# EAGLE board Granny Safe1 (EAGLE 8.4.0)
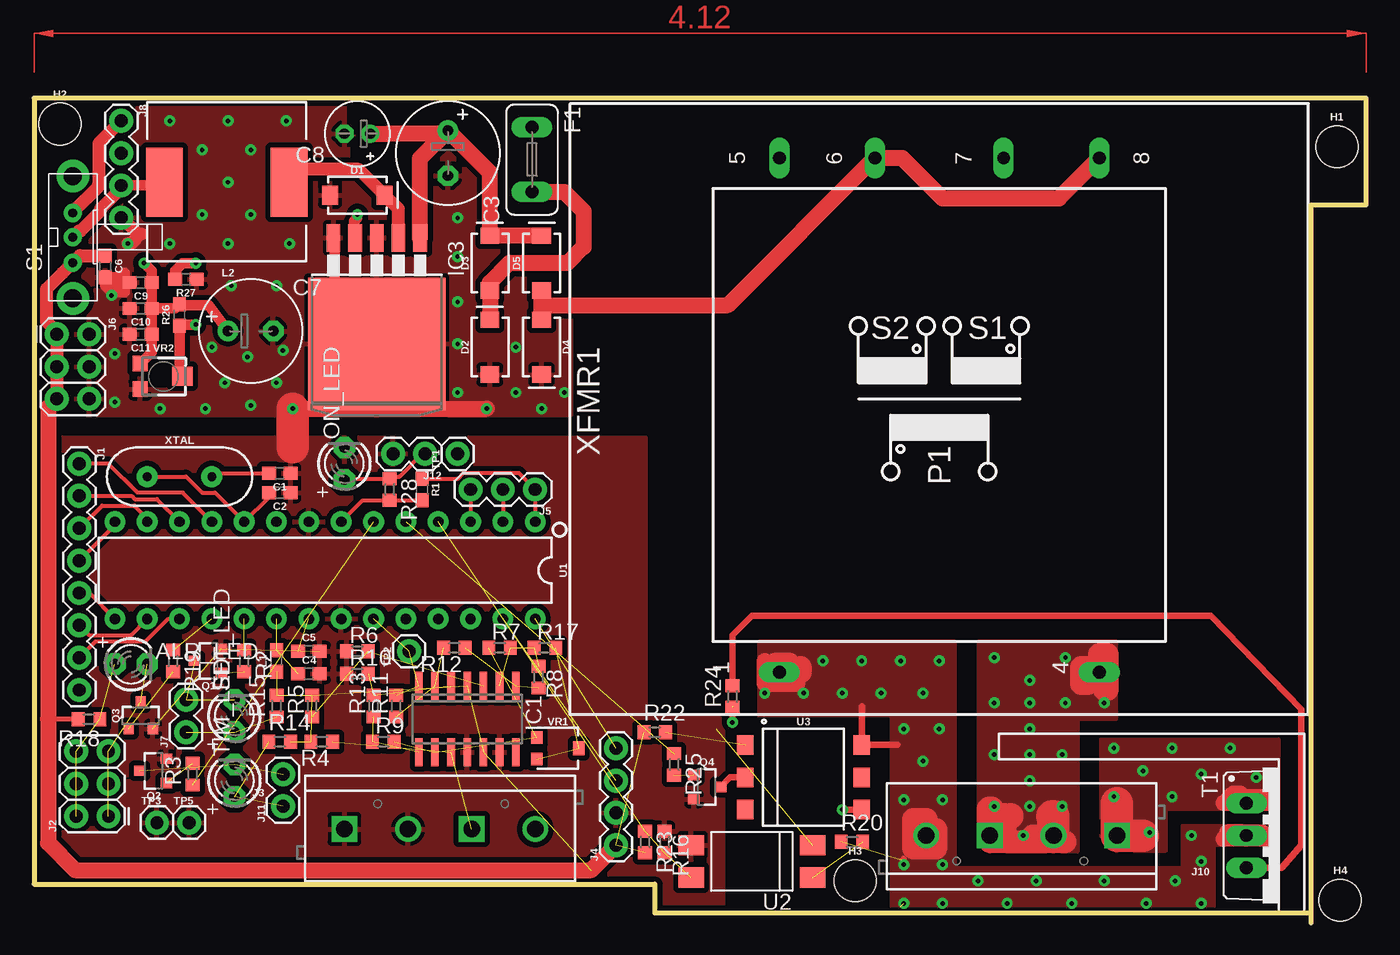
[diagram p0: board, top side]
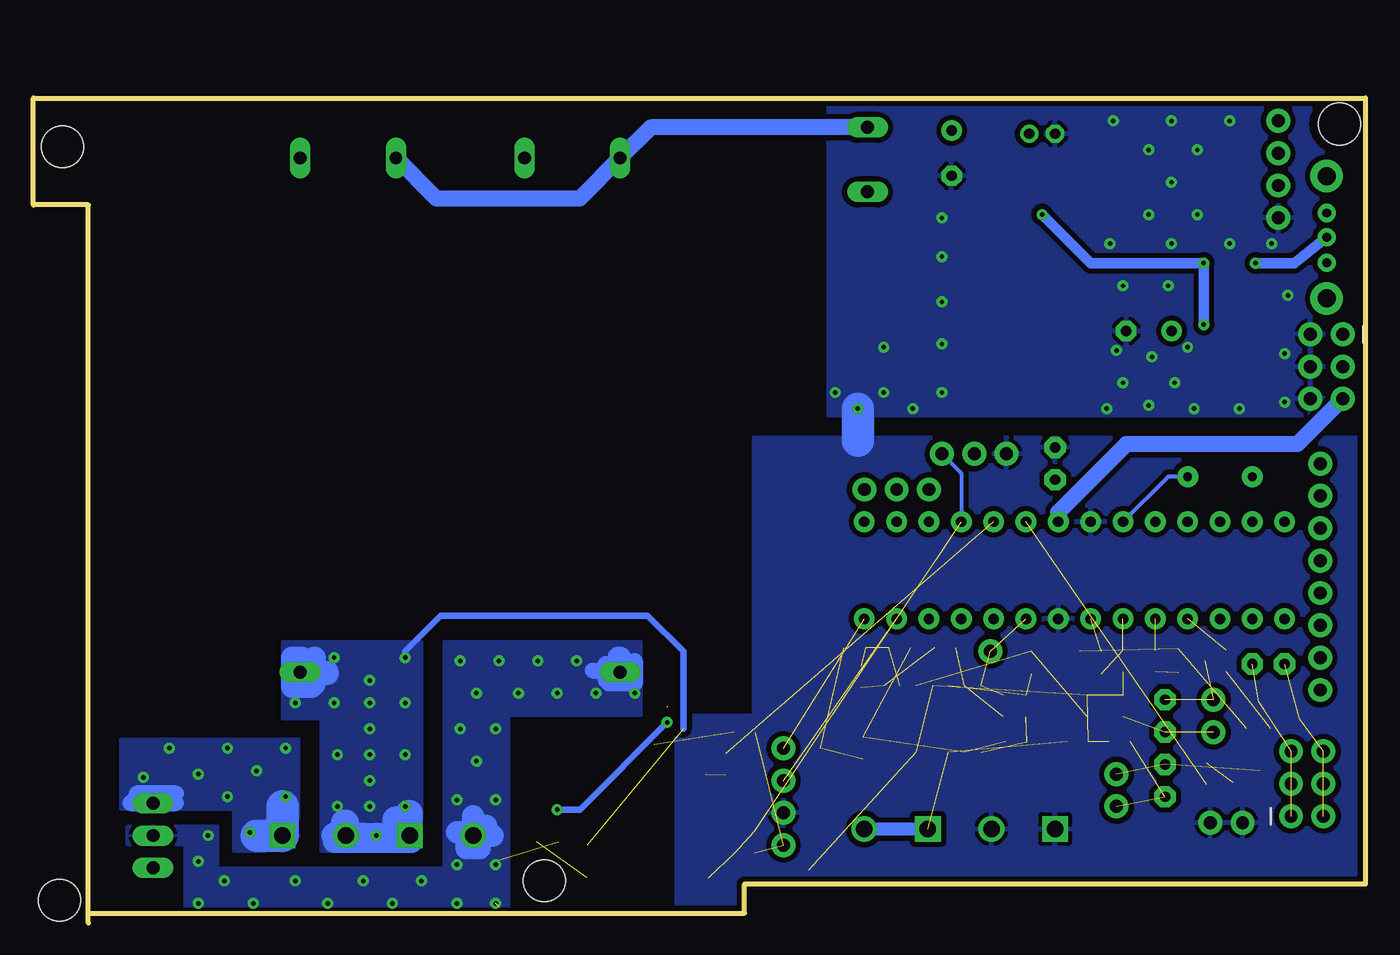
[diagram p1: board, bottom side, seen from below]

Size 104.65 x 64.77 mm. Coordinates in mm from the lower left corner, seen from the top.
Outline: 100.33,0 100.33,0.76
Outline: 100.33,0.76 100.33,56.39 104.65,56.39 104.65,64.77 0,64.77 0,3.05 48.77,3.05 48.77,0.76 100.33,0.76
Copper layers (1*16): Top 0.035mm / dielectric 1.5mm / Bottom 0.035mm
Design rules "SparkFun *": minimum track width 8mil, minimum drill 20mil, track to track 8mil, track to pad 8mil, pad to pad 8mil, via to via 8mil, smd to smd 8mil, copper to edge 10mil, drill to drill 8mil, minimum pad ring 12mil, minimum via ring 10mil, stop-mask expansion 4mil, vias tented up to drill 25mil, thermal gap 12mil
tRestrict: area 25.4,57.1 to 29.2,61.2; area 25.1,62.5 to 30.5,64; area 9.4,42.7 to 10.4,46.2; area 8.4,49.3 to 8.6,49.5

## Footprints (pad centres in the part's own frame; a part is rotated, then mirrored left to right if it is on the bottom)
LED3MM = drill 0.813 pad 1.676 octagon: A -1.27,0; K 1.27,0
0603 = smd 1.1 x 1: 1 -0.85,0; 2 0.85,0
E3,5-8 = drill 0.813 pad 1.6: + -1.778,0 | drill 0.813 pad 1.6 octagon: - 1.778,0
E2-5 = drill 0.813 pad 1.422: + -1.016,0 | drill 0.813 pad 1.422 octagon: - 1.016,0
SMA-DIODE = smd 1.27 x 1.47: A -2.15,0; C 2.15,0
TE5 = drill 1.016 long: 1 -2.54,0; 2 2.54,0
STAND-OFF = hole 3.302: 0,0
SO14 = smd 0.6 x 2.2: 1 -3.81,-2.6; 2 -2.54,-2.6; 3 -1.27,-2.6; 4 0,-2.6; 5 1.27,-2.6; 6 2.54,-2.6; 7 3.81,-2.6; 8 3.81,2.6; 9 2.54,2.6; 10 1.27,2.6; 11 0,2.6; 12 -1.27,2.6; 13 -2.54,2.6; 14 -3.81,2.6
TO263-5 = smd 1.067 x 2.159: 1 -3.404,-5.791; 2 -1.702,-5.791; 3 0,-5.791; 4 1.702,-5.791; 5 3.404,-5.791 | smd 10.8 x 10.41: 6 0,2.54
1X08 = drill 1.016 pad 1.88: 1 0,0; 2 2.54,0; 3 5.08,0; 4 7.62,0; 5 10.16,0; 6 12.7,0; 7 15.24,0; 8 17.78,0
2X3 = drill 1.016 pad 1.88: 1 0,0; 2 0,2.54; 3 2.54,0; 4 2.54,2.54; 5 5.08,0; 6 5.08,2.54
SCREWTERMINAL-5MM-2 = drill 1.3 pad 2.032 square: 1 0,0; 3 10,0 | drill 1.3 pad 2.032: 2 5,0; 4 15,0
1X04 = drill 1.016 pad 1.88: 1 0,0; 2 2.54,0; 3 5.08,0; 4 7.62,0
1X03 = drill 1.016 pad 1.88: 1 0,0; 2 2.54,0; 3 5.08,0
1X02 = drill 1.016 pad 1.88: 1 0,0; 2 2.54,0
CR75 = smd 2.9 x 5.4: P$1 -4.8,0; P$2 5,0
PCB_MOUNT_SPEAKER = drill 1.143 square: + -7.62,0; - 7.62,0
SOT23-3 = smd 0.8 x 0.9: 1 -0.95,-1; 2 0.95,-1; 3 0,1.1
R0603 = smd 1 x 1.1: 1 -0.85,0; 2 0.85,0
AXIAL-0.3 = drill 0.9 pad 1.88: P$1 -3.81,0; P$2 3.81,0
EG1213 = drill 0.7 pad 1.422: 1 -2,0; 2 0,0; 3 1.9,0 | drill 1.4 pad 2.54: MT1 -4.8,0; MT2 4.8,0
TO220BV = drill 1.016 long: G 2.54,-2.54; T1 -2.54,-2.54; T2 0,-2.54
1X01 = drill 1.016 pad 1.88: 1 0,0
DIP28 = drill 0.813 pad 1.626: 1 -16.51,-3.81; 2 -13.97,-3.81; 3 -11.43,-3.81; 4 -8.89,-3.81; 5 -6.35,-3.81; 6 -3.81,-3.81; 7 -1.27,-3.81; 8 1.27,-3.81; 9 3.81,-3.81; 10 6.35,-3.81; 11 8.89,-3.81; 12 11.43,-3.81; 13 13.97,-3.81; 14 16.51,-3.81; 15 16.51,3.81; 16 13.97,3.81; 17 11.43,3.81; 18 8.89,3.81; 19 6.35,3.81; 20 3.81,3.81; 21 1.27,3.81; 22 -1.27,3.81; 23 -3.81,3.81; 24 -6.35,3.81; 25 -8.89,3.81; 26 -11.43,3.81; 27 -13.97,3.81; 28 -16.51,3.81
DIL4-SMD = smd 1.6 x 2: 1 -1.27,-4.77; 2 1.27,-4.77; 3 1.27,4.77; 4 -1.27,4.77
DIP8SMD = smd 1.524 x 1.27: 1 -2.54,-4.572; 2 0,-4.572; 3 2.54,-4.572; 4 2.54,4.572; 5 0,4.572; 6 -2.54,4.572
TRIMPOT-SMD-3MM-CLOSED = smd 1 x 0.9: 1 -0.85,-1.65; 3 0.85,-1.65 | smd 1.1 x 0.9: 2 0,1.65
TRIMPOT-SMD-TC33X = smd 1.2 x 1.2: 1 -1,-1.825; 3 1,-1.825 | smd 1.5 x 1.6: 2 0,1.5
EE20-2 = drill 1.016 long: 1 -17.653,12.573; 4 -17.653,-12.573; 5 22.733,12.573; 6 22.733,5.055; 7 22.733,-5.055; 8 22.733,-12.573
HC49US = drill 0.7 pad 1.651: 1 -2.54,0; 2 2.54,0

## Placement (x,y rotation side)
ALR_LED  [LED3MM]  7.62,20.32 0 top
C1  22pF  [0603]  19.3,35.31 180 top
C2  22pF  [0603]  19.3,33.78 180 top
C3  470u  [E3,5-8]  32.51,60.45 270 top
C4  0.1uF  [0603]  21.59,19.56 0 top
C5  0.1uF  [0603]  21.59,21.34 0 top
C6  0.1uF  [0603]  5.59,51.56 270 top
C7  470u  [E3,5-8]  17.02,46.48 0 top
C8  100u  [E2-5]  25.4,61.98 180 top
C9  0.1uF  [0603]  8.38,50.29 180 top
C10  100pF  [0603]  8.38,48.26 180 top
C11  1nF  [0603]  8.38,46.23 180 top
D1  [SMA-DIODE]  25.4,57.15 0 top
D2  [SMA-DIODE]  35.81,45.21 90 top
D3  [SMA-DIODE]  35.81,51.82 90 top
D4  [SMA-DIODE]  39.88,45.21 270 top
D5  [SMA-DIODE]  39.88,51.82 90 top
F1  1.5A  [TE5]  39.12,59.94 270 top
H1  STAND-OFF  [STAND-OFF]  102.36,60.96 0 top
H2  STAND-OFF  [STAND-OFF]  2.03,62.74 0 top
H3  STAND-OFF  [STAND-OFF]  64.52,3.3 0 top
H4  STAND-OFF  [STAND-OFF]  102.62,1.78 0 top
IC1  MCP604SL  [SO14]  34.04,16 180 top
IC3  [TO263-5]  26.92,48.01 180 top
J1  3x4 Keypad  [1X08]  3.56,36.07 270 top
J2  FEMALE 2x3  [2X3]  5.84,8.38 90 top
J3  SCREW-4  [SCREWTERMINAL-5MM-2]  24.38,7.37 0 top
J4  i2c_16x2  [1X04]  45.72,6.1 90 top
J5  [1X03]  39.37,34.04 180 top
J6  FEMALE 2x3  [2X3]  1.78,46.23 270 top
J7  [1X02]  11.94,14.99 90 top
J8  RES JUMPER  [1X04]  6.86,62.99 270 top
J10  SCREW-4  [SCREWTERMINAL-5MM-2]  85.09,6.86 180 top
J11  [1X02]  19.56,9.14 90 top
J12  [1X02]  30.73,36.83 180 top
L1  10uH  [0603]  19.05,20.57 90 top
L2  INDUCTOR  [CR75]  15.24,58.17 180 top
LS1  SPEAKER  [PCB_MOUNT_SPEAKER]  -137.16,-21.08 0 top  (outside the outline)
ON_LED  [LED3MM]  24.38,36.07 90 top
Q1  [SOT23-3]  13.72,20.57 90 top
Q2  [SOT23-3]  9.4,11.94 90 top
Q3  [SOT23-3]  8.38,16.26 0 top
Q4  2N3904  [SOT23-3]  52.83,10.67 270 top
R1  10k  [0603]  30.48,34.04 270 top
R2  2k  [R0603]  16.51,20.57 270 top
R3  2k  [R0603]  12.45,11.68 90 top
R4  2.4k  [R0603]  22.61,14.22 180 top
R5  2.4k  [R0603]  21.84,17.02 90 top
R6  100  [R0603]  25.4,21.34 0 top
R7  10k  [R0603]  36.58,21.59 0 top
R8  20k  [R0603]  39.62,19.3 270 top
R9  20k  [R0603]  27.43,14.22 0 top
R10  15k  [R0603]  25.4,19.56 0 top
R11  15k  [R0603]  28.45,17.02 90 top
R12  3k  [R0603]  33.02,21.59 180 top
R13  3k  [R0603]  26.67,17.02 90 top
R14  150  [R0603]  19.3,14.22 0 top
R15  150  [R0603]  19.05,17.02 90 top
R16  1M  [R0603]  49.53,6.35 270 top
R17  5k  [R0603]  40.13,21.59 0 top
R18  150  [R0603]  4.32,16 180 top
R19  2k  [R0603]  10.92,20.57 270 top
R20  10k  [R0603]  64.26,6.35 0 top
R22  220  [R0603]  48.77,14.99 0 top
R23  10k  [R0603]  48.01,6.35 270 top
R24  180  [R0603]  54.86,17.78 90 top
R25  2k  [R0603]  50.29,12.45 270 top
R26  3.3k  [0603]  11.43,47.75 90 top
R27  1k  [0603]  11.94,50.55 180 top
R28  150  [R0603]  27.94,34.04 270 top
RTD  [AXIAL-0.3]  -113.03,98.3 0 top  (outside the outline)
S1  EG1213  [EG1213]  3.05,53.85 90 top
SET_LED  [LED3MM]  15.75,16.26 90 top
T1  BT137  [TO220BV]  97.79,6.86 270 top
TIM_LED  [LED3MM]  15.75,11.18 90 top
TP1  [1X01]  33.27,36.83 90 top
TP2  [1X01]  29.46,21.34 90 top
TP3  [1X01]  9.65,7.87 0 top
TP5  [1X01]  12.19,7.87 0 top
U1  328P  [DIP28]  22.86,27.69 180 top
U2  SFH6206  [DIL4-SMD]  56.39,4.83 90 top
U3  MOC3051  [DIP8SMD]  60.45,11.43 270 top
VR1  10k  [TRIMPOT-SMD-3MM-CLOSED]  41.15,13.72 270 top
VR2  10k  [TRIMPOT-SMD-TC33X]  10.16,42.93 270 top
XFMR1  EE20-2  [EE20-2]  71.12,37.34 90 top
XTAL  16MHz  [HC49US]  11.43,35.05 0 top

## Library data of the parts
ALR_LED C3 C7 C8 ON_LED R2 R3 R14 R15 R18-R20 R22-R25 R28 S1 SET_LED TIM_LED = adafruit
C1 C2 = SparkFun-Capacitors; PROD_ID: CAP-07876
C4-C6 = SparkFun-Capacitors; PROD_ID: CAP-00810
C9 = SparkFun-Capacitors; PROD_ID: CAP-08604
C10 = SparkFun-Capacitors; PROD_ID: CAP-07883
C11 = SparkFun-Capacitors; PROD_ID: CAP-07886
D1-D5 = SparkFun-DiscreteSemi; PROD_ID: DIO-09886
F1 = fuse; OC_FARNELL: unknown; OC_NEWARK: unknown
H1-H4 = SparkFun-Hardware
IC1 IC3 = linear
J1 = SparkFun-Connectors; PROD_ID: CONN-08438
J2 J6 = SparkFun-Connectors; PROD_ID: CONN-11566
J3 J10 L2 T1 U3 XFMR1 = ece
J4 J8 = SparkFun-Connectors; PROD_ID: CONN-09696
J5 J7 J11 J12 TP1-TP3 TP5 = SparkFun-Connectors
L1 = SparkFun-Coils; PROD_ID: NDUC-07874
LS1 = SparkFun-Electromechanical; PROD_ID: COMP-11789; SF_SKU: COM-11089
Q1-Q4 = SparkFun-DiscreteSemi; PROD_ID: TRANS-09116
R1 = SparkFun-Resistors; PROD_ID: RES-00824
R4-R13 R16 R17 = resistor
R26 = SparkFun-Resistors; PROD_ID: RES-07851
R27 = SparkFun-Resistors; PROD_ID: RES-07856
RTD = SparkFun-Resistors; PROD_ID: RES-12183
U1 = SparkFun-IC-Microcontroller; PROD_ID: IC-09136
U2 = optocoupler; MF: VISHAY/TELEFUNKEN; MPN: SFH6206-3; OC_FARNELL: 1469585; OC_NEWARK: 58K2214
VR1 = SparkFun-Resistors; PROD_ID: RES-09285
VR2 = SparkFun-Resistors; PROD_ID: RES-12428
XTAL = SparkFun-Clocks; PROD_ID: XTAL-08181; SF_ID: COM-00536

## Nets
5V: C6.1 IC1.4 IC1.12 J4.1 J6.1 J6.3 J6.5 L1.1 R1.2 R4.2 R5.2 R14.2 R15.2 R18.2 R22.1 R23.2 R28.2 S1.1 U1.7
ADC0: IC1.7 R11.2 TP2.1 U1.23
ALR: R19.1 U1.18
GATE: R25.1 U1.5
GND: C1.1 C2.1 C3.- C4.2 C5.2 C6.2 C7.- C8.- C9.2 C10.2 C11.2 D1.A D2.A D4.C IC1.11 IC1.13 IC3.3 IC3.5 IC3.6 J3.1 J3.2 J4.2 J6.2 J6.4 J6.6 J8.4 J12.2 ON_LED.K Q1.2 Q2.2 Q3.2 Q4.2 R6.1 R10.1 R16.1 R27.1 TP3.1 TP5.1 U1.8 U1.22 U2.3 VR2.3
LINE: J10.4 R20.1 T1.T2 U3.6 XFMR1.1
N$1: C1.2 U1.9 XTAL.2
N$2: C2.2 U1.10 XTAL.1
N$3: J1.7 U1.17
N$4: J8.1 S1.3
N$5: C5.1 U1.21
N$6: J1.6 U1.16
N$7: J1.5 U1.15
N$8: J1.4 U1.14
N$9: J1.3 U1.13
N$10: J1.2 U1.12
N$11: J1.1 U1.11
N$12: Q1.1 R2.2
N$13: IC1.10 J3.3 J3.4 R4.1
N$14: Q2.1 R3.2
N$15: IC1.3 R5.1 R6.2
N$16: IC1.1 R8.2 R12.1
N$17: J7.1 R15.1 SET_LED.A
N$18: J11.1 R14.1 TIM_LED.A
N$19: J11.2 Q2.3 TIM_LED.K
N$20: J7.2 Q1.3 SET_LED.K
N$21: R17.2 VR1.2 VR1.3
N$22: D2.C D3.A F1.2
N$23: ALR_LED.K J2.1 J2.3 J2.5 Q3.3
N$24: IC1.2 R7.2 R8.1 R17.1
N$25: IC1.8 R9.1 R13.1
N$26: IC1.9 R7.1 R9.2 VR1.1
N$27: IC1.5 R10.2 R13.2
N$28: IC1.6 R11.1 R12.2
N$29: R20.2 U2.1
N$30: R24.2 T1.G
N$31: R22.2 U3.1
N$32: R24.1 U3.4
N$33: IC3.4 R26.1 R27.2 VR2.2
N$34: Q4.3 U3.2
N$35: Q4.1 R25.2
N$36: J12.1 ON_LED.A R28.1
N$37: F1.1 XFMR1.5 XFMR1.7
N$38: C7.+ C9.1 C10.1 C11.1 J8.3 L2.P$2 R26.2 S1.2 VR2.1
N$39: ALR_LED.A J2.2 J2.4 J2.6 R18.1
N$40: Q3.1 R19.2
N$41: D4.A D5.A XFMR1.6 XFMR1.8
N$43: C4.1 L1.2 U1.20
N$46: D1.C IC3.2 L2.P$1
N$51: C3.+ C8.+ D3.C D5.C IC3.1
NEUT: J10.2 J10.3 U2.2 XFMR1.4
PWR: J10.1 T1.T1
RST: J5.1 R1.1 U1.1
RX: J5.2 U1.2
SCL: J4.4 U1.28
SDA: J4.3 U1.27
SET: R2.1 U1.19
T_EN: R3.1 U1.6
TX: J5.3 U1.3
ZERO: R16.2 R23.1 TP1.1 U1.4 U2.4

## Tracks (layer width: path | path; a pad name or v marks a point on that pad's centre or on a via)
5V  (9 unrouted)
  Top 0.305: U1.7 25.82,33.19 R28.2 R1.2
  Top 0.406: R18.2 1.09,16
  Top 1.016: 0.97,47.5 0.97,49.77 2.23,51.03 S1.1 3.61,52.41 C6.1 | 0.97,47.5 | 0.97,47.5 0.97,47.24 1.78,46.43 J6.1 J6.3 J6.5
  Top 1.27: J6.5 1.09,40.46 1.09,16 1.09,6.27 3.23,4.14 43.76,4.14 J4.1
  Bottom 1.27: J6.5 5.33,37.59 18.8,37.59 24.13,32.26 U1.7
ADC0  (3 unrouted)
ALR  (1 unrouted)
GATE  (1 unrouted)
GND  (via drill 0.35)  (2 unrouted)
  Top 0.508: 51.47,5.84 U2.3
  Top 0.813: C9.2 6.01,50.29 C6.2 | C6.2 6.77,50.71 7.11,51.05 7.11,49.53 6.1,49.53 5.59,50.04 C6.2 | IC3.5 23.62,53.7 23.62,48.77 IC3.6
  Top 1.016: J8.4 8.13,54.1 8.38,54.1 7.62,53.34 v7.37,53.34
  Top 1.27: v20.32,40.39 v35.56,40.39
  Top 2.54: 20.32,37.34 v20.32,40.39
  Bottom 2.54: v39.88,40.39 39.88,37.85
  other vias: 10.67,62.99 15.24,62.99 19.81,62.99 13.21,60.71 17.02,60.71 17.02,55.63 13.21,55.63 10.67,53.34 15.24,53.34 20.07,53.34 15.24,58.17 33.27,55.37 33.27,52.32 33.27,48.77 33.27,45.47 33.27,41.66 37.85,45.21 37.85,41.66 41.66,41.66 6.1,49.28 6.35,44.7 6.35,40.89 9.91,40.39 13.46,40.39 14.99,42.42 16.76,44.45 13.97,45.21 19.56,44.96 15.49,50.04 19.05,50.04 19.05,42.42 17.02,40.64
  pour Top (isolate 0.406): 0,64.77 42.16,64.77 42.16,39.88 0,39.88
  pour Bottom (isolate 0.406): 0,65.28 0,39.88 42.16,39.88 42.16,65.28
  pour Top (isolate 0.406): -1.52,38.1 48.01,38.1 48.01,16.26 54.1,16.26 54.1,0 -1.52,0
  pour Bottom (isolate 0.406): -1.52,38.1 -1.52,-1.27 54.1,-1.27 54.1,16.26 48.01,16.26 48.01,38.1
LINE  (via drill 0.35)  (2 unrouted)
  Top 0.406: 68.16,4.91 68.33,5.08 v68.33,4.57
  Top 0.508: 65.02,17.02 U3.6 67.82,13.97
  Top 1.27: XFMR1.1 58.29,19.68 57.4,20.57 57.4,18.8 59.94,18.8 59.44,19.3 59.44,20.57 58.17,20.57 57.91,20.32 57.91,19.56 | 93.47,6.6 97.03,6.6 96.52,7.11 95,7.11 | T1.T2 95,7.11 | 95,7.11 93.73,7.11
  Top 1.778: XFMR1.1 60.2,19.68 60.2,20.07 | J10.4 70.09,8.13 69.09,8.13 69.09,5.84 70.87,5.84 70.87,7.37
  Bottom 1.27: XFMR1.1 58.29,19.68 57.4,20.57 57.4,18.8 59.44,18.8 59.69,19.05 59.69,20.32 59.18,20.32 XFMR1.1 | 60.71,19.81 58.67,19.81 XFMR1.1
  Bottom 1.778: J10.4 70.09,8.38 70.1,8.38 | J10.4 68.58,6.86 | J10.4 70.09,7.11 71.37,7.11 | J10.4 70.61,6.86 70.61,5.84 | J10.4 70.09,5.84 69.6,5.84 | J10.4 69.09,6.86 69.09,7.62 | XFMR1.1 58.55,20.83 58.67,20.83
  other vias: 61.98,20.57 65.02,20.57 68.07,20.57 63.5,18.03 71.12,20.57 69.85,18.03 66.55,18.03 60.45,18.03 57.4,18.03 71.12,15.24 69.85,12.7 71.37,9.65 68.33,9.65 71.37,4.57 68.33,1.52 74.17,3.3 71.37,1.52 78.74,3.3 76.45,1.52 81.53,1.52 84.07,3.3 87.38,1.52 89.66,3.3 91.69,1.52 68.33,15.24 91.69,4.83 90.93,6.86
  pour Top: 56.9,22.1 56.9,16.26 67.31,16.26 67.31,0.76 92.71,0.76 92.71,6.1 97.54,6.1 97.54,7.62 90.17,7.62 90.17,4.32 72.39,4.32 72.39,22.1
  pour Bottom: 56.9,22.1 56.9,16.26 67.31,16.26 67.31,0.76 92.71,0.76 92.71,6.1 97.28,6.1 97.28,7.62 90.17,7.62 90.17,4.32 72.39,4.32 72.39,22.1
N$1
  Top 0.305: XTAL.2 14.22,35.31 C1.2
  Bottom 0.305: XTAL.2 15.49,35.05 U1.9
N$2
  Top 0.305: C2.2 18.87,34.12 | XTAL.1 11.94,35.05 13.21,33.78 14.22,33.78 U1.10 18.45,33.44 C2.2 | 18.71,33.69 C2.2
N$3
  Top 0.305: J1.7 4.83,22.1 8.76,22.1 10.54,23.88 U1.17
N$4
  Top 1.016: J8.1 5.08,61.21 5.08,57.91 5.03,57.86 5.03,57.83 3.05,55.85 S1.3
N$5  (1 unrouted)
N$6
  Top 0.305: J1.6 4.32,22.61 7.62,22.61 U1.16
N$7
  Top 0.305: J1.5 4.32,25.91 U1.15
N$8
  Top 0.305: U1.14 6.35,31.24 J1.4
N$9
  Top 0.305: J1.3 5.33,32.77 7.87,32.77 8.89,31.75 U1.13
N$10
  Top 0.305: J1.2 7.66,33.53 7.92,33.27 9.65,33.27 U1.12
N$11
  Top 0.305: U1.11 11.68,33.78 8.13,33.78 5.84,36.07 J1.1
N$12  (1 unrouted)
N$13  (2 unrouted)
  Bottom 1.016: J3.3 J3.4
N$14  (1 unrouted)
N$15  (2 unrouted)
N$16  (2 unrouted)
N$17  (2 unrouted)
N$18  (2 unrouted)
N$19  (2 unrouted)
N$20  (2 unrouted)
N$21  (2 unrouted)
N$22
  Top 1.27: F1.2 41.66,57.4 43.18,55.88 43.18,53.09 41.91,51.82 37.34,51.82 35.81,50.29 D3.A D2.C
N$23  (4 unrouted)
N$24  (3 unrouted)
N$25  (2 unrouted)
N$26  (3 unrouted)
N$27  (2 unrouted)
N$28  (2 unrouted)
N$29  (1 unrouted)
N$30
  Top 0.508: T1.G 98.04,4.32 99.55,6.08 99.55,16.76 92.44,24.13 56.39,24.13 54.86,22.61 R24.2
N$31  (1 unrouted)
N$32  (via drill 0.35)  (1 unrouted)
  Top 0.508: R24.1 54.86,16.63 | 54.86,17.02 v54.86,15.75 | v63.5,8.89 U3.4
  Bottom 0.508: v54.86,15.75 61.72,8.89 v63.5,8.89
N$33  (via drill 0.35)
  Top 0.813: VR2.2 11.43,43.16 R26.1 11.52,46.99 v12.7,46.99 | v25.4,55.63 25.4,55.37 25.15,55.12 25.15,53.87 IC3.4 | R27.2 11.09,51.22 11.68,51.82 v12.7,51.82
  Bottom 0.813: v25.4,55.63 21.59,51.82 v12.7,51.82 v12.7,46.99
N$34
  Top 0.508: Q4.3 54.69,11.43 U3.2
N$35  (1 unrouted)
N$36
  Top 0.305: ON_LED.A 24.47,34.89 R28.1 28.11,35.05 28.7,35.05 30.48,36.83 J12.1
N$37
  Bottom 1.27: XFMR1.7 73,56.9 61.72,56.9 XFMR1.5 56.13,62.48 F1.1
N$38  (via drill 0.35)
  Top 0.813: J8.3 9.99,57.91 L2.P$2 | v8.64,51.82 9.23,51.22 C9.1 C10.1 | C10.1 C11.1 9.23,44.82 VR2.1 | C10.1 11.09,48.26 R26.2 11.52,48.51 13.72,48.51 C7.+
  Top 1.016: S1.2 3.53,54.33 3.64,54.33 5.21,55.89 5.21,56.06 6.86,57.71 J8.3
  Bottom 0.813: S1.2 5.59,51.82 v8.64,51.82
N$39  (4 unrouted)
N$40  (1 unrouted)
N$41
  Top 1.27: XFMR1.8 80.52,56.9 71.37,56.9 68.2,60.07 XFMR1.6 54.51,48.51 39.88,48.51 | D4.A 39.88,48.51 | 39.88,48.51 D5.A
N$43  (2 unrouted)
N$46
  Top 1.016: IC3.2 28.63,56.07 D1.C 25.52,59.18 20.32,59.18 20.04,58.9 L2.P$1
N$51
  Top 1.27: D5.C D3.C 35.81,58.93 C3.+ | C8.+ 27.84,61.98 27.87,62 32.28,62 C3.+ | IC3.1 30.33,60.05 C3.+
NEUT  (via drill 0.35)  (1 unrouted)
  Top 1.778: J10.2 78.49,6.86 78.49,6.6 78.74,6.6 78.74,6.35 | 78.74,6.35 81.03,6.35 | 78.74,6.35 75.09,6.35 J10.3 | XFMR1.4 83.69,21.08 84.33,21.08 84.33,18.29 84.07,18.29 84.07,20.07 82.3,20.07 82.3,18.8 82.8,18.8
  Top 2.032: J10.3 75.09,8.89 75.18,8.89 | 76.2,8.38 75.69,8.38 75.69,7.37 75.09,7.37 J10.3 | J10.3 75.09,6.6 | J10.3 76.2,6.86 76.2,8.38 | 76.2,8.38 76.71,8.38
  Top 2.54: J10.2 80.09,8.38 80.01,8.38
  Bottom 0.508: 53.59,15.24 53.59,21.34 56.39,24.13 72.64,24.13 75.44,21.34 v75.44,20.83
  Bottom 1.778: 81.03,6.86 81.03,6.35 74.93,6.35 74.93,8.64 75.09,8.64 | 81.53,19.56 81.53,19.68 XFMR1.4 83.57,19.68 83.57,20.83 84.33,20.83 84.33,18.54 82.8,18.54 82.8,18.8 82.55,18.8 82.55,20.83
  Bottom 2.032: J10.3 75.09,8.64 75.18,8.64 | J10.3 76.71,6.86 | J10.3 75.09,8.13 76.2,8.13 | 78.74,6.86 J10.2 | J10.2 80.09,7.87 80.26,7.87 | J10.2 81.03,6.86 | J10.2 v77.72,6.86 J10.3
  other vias: 75.44,9.14 80.77,9.14 78.23,11.18 75.44,13.21 80.77,13.21 78.23,15.24 78.23,13.21 75.44,17.27 78.23,19.05 84.07,17.27 81.03,20.83 78.23,17.27 81.03,17.27 78.23,9.14
  pour Top: 74.17,5.59 82.04,5.59 82.04,16 85.09,16 85.09,22.1 74.17,22.1
  pour Bottom: 74.17,22.1 74.17,5.59 82.04,5.59 82.04,16 85.09,16 85.09,22.1
PWR  (via drill 0.35)
  Top 1.27: T1.T1 93.47,9.4 94.23,10.16 94.74,10.16 95,9.91 96.77,9.91 97.03,9.65 97.03,9.4 T1.T1
  Top 2.54: 85.09,9.4 J10.1 87.12,6.86
  Bottom 1.27: T1.T1 93.47,9.4 93.98,9.4 94.74,10.16 93.47,10.16 96.52,10.16 96.52,9.91 97.03,9.4 T1.T1
  Bottom 2.54: 85.09,9.14 J10.1 87.12,6.86
  other vias: 84.84,13.72 84.84,9.91 87.12,11.94 89.41,13.72 89.41,9.91 87.63,7.11 91.69,11.68 93.98,13.72 96.01,11.43
  pour Top: 83.82,5.59 83.82,14.48 97.79,14.48 97.79,8.89 88.9,8.89 88.9,5.59
  pour Bottom: 83.82,14.48 83.82,5.59 88.9,5.59 88.9,8.89 97.79,8.89 97.79,14.48
RST
  Top 0.305: U1.1 J5.1 38.08,35.33 33.75,35.33 33.31,34.89 R1.1
RX
  Top 0.305: J5.2 U1.2
SCL  (1 unrouted)
SDA  (1 unrouted)
SET  (1 unrouted)
T_EN  (1 unrouted)
TX
  Top 0.305: J5.3 U1.3
ZERO  (3 unrouted)
  Bottom 0.305: U1.4 31.75,35.31 TP1.1
(copper drawn outside any net)
  shapes: Top area x1